# Altium PCB CW308T-FE310-G002.PcbDoc
Units mil, origin at the board's own origin, x right, y up, seen from the top; angles counter-clockwise.
Board outline 2055 x 2540 mil, 2 copper layers (Top Layer, Bottom Layer); 21 components, 35 nets, 165 pads, 219 vias.
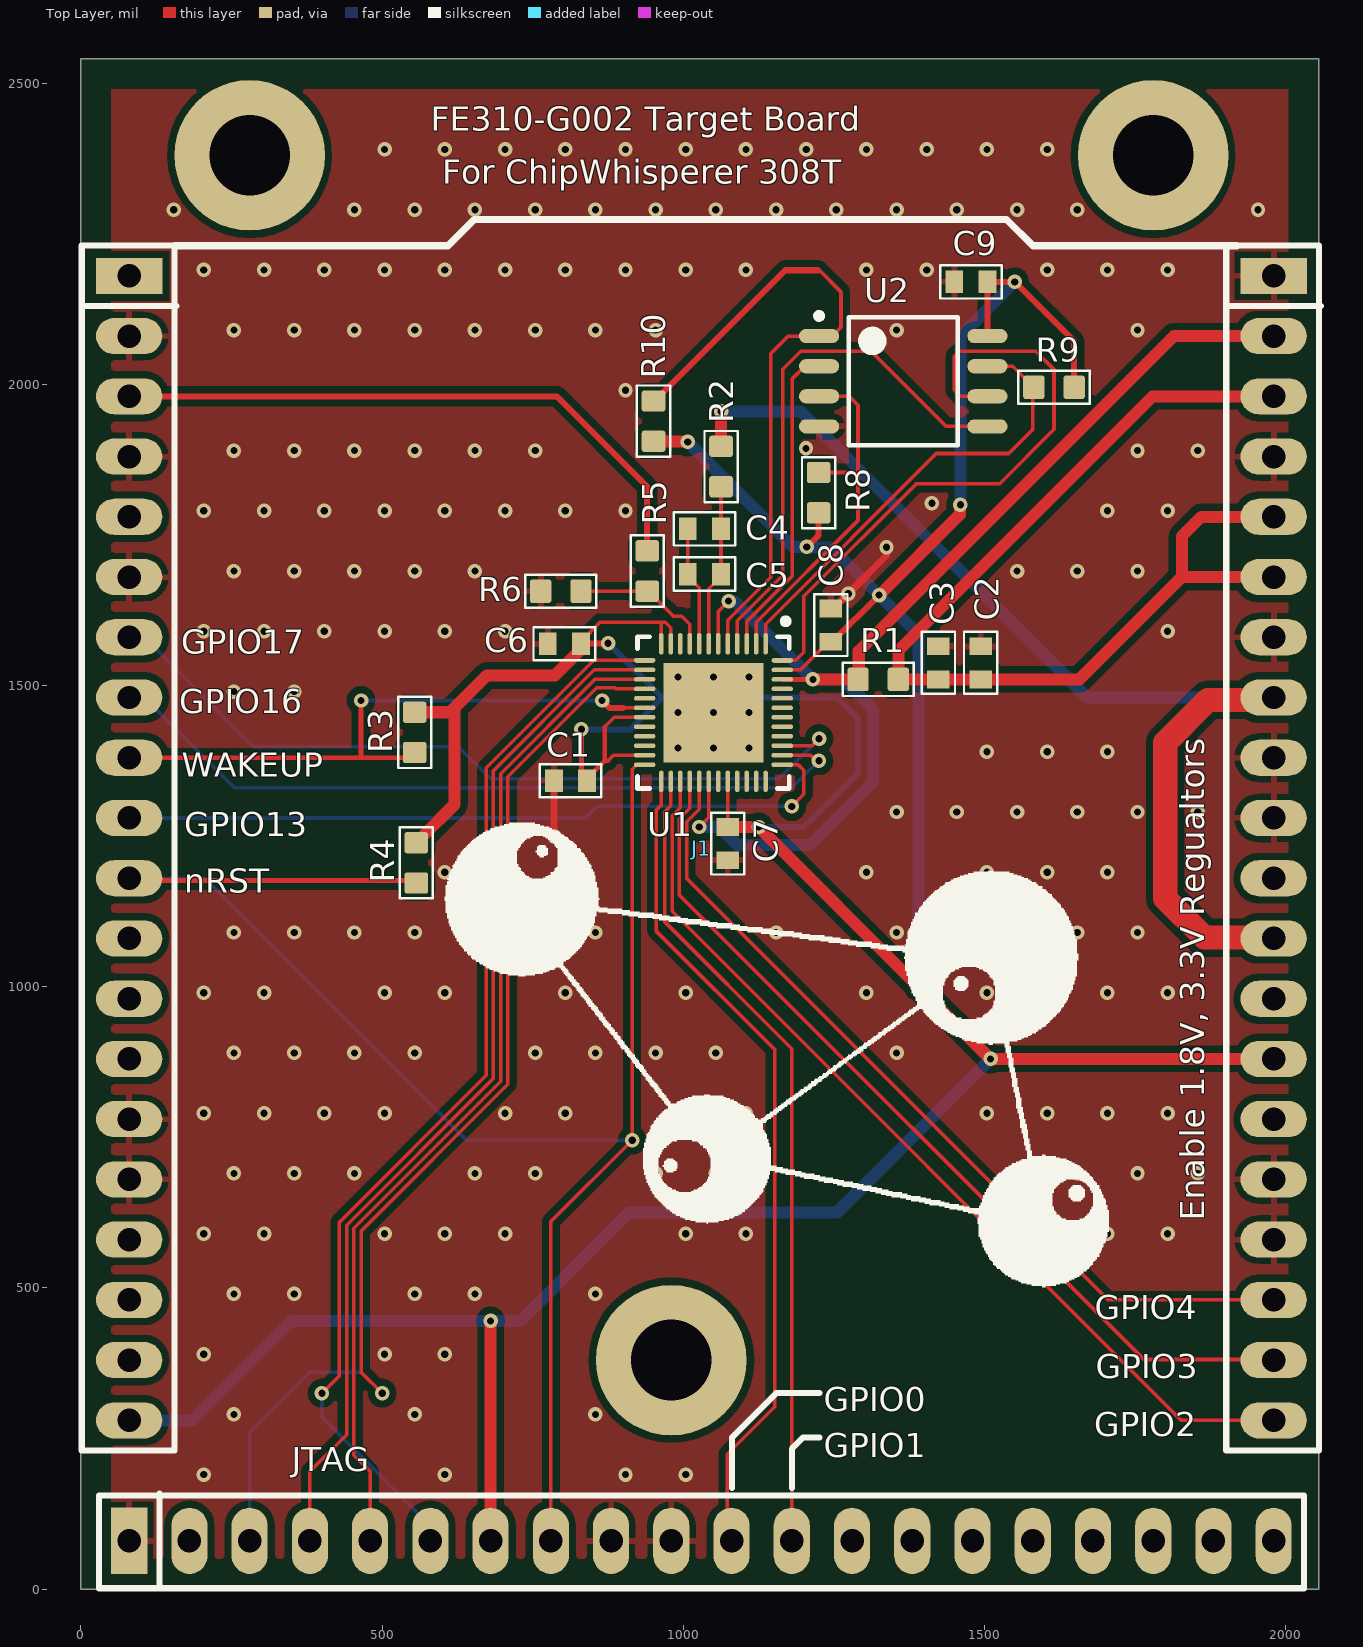
[diagram p0: Top Layer view]
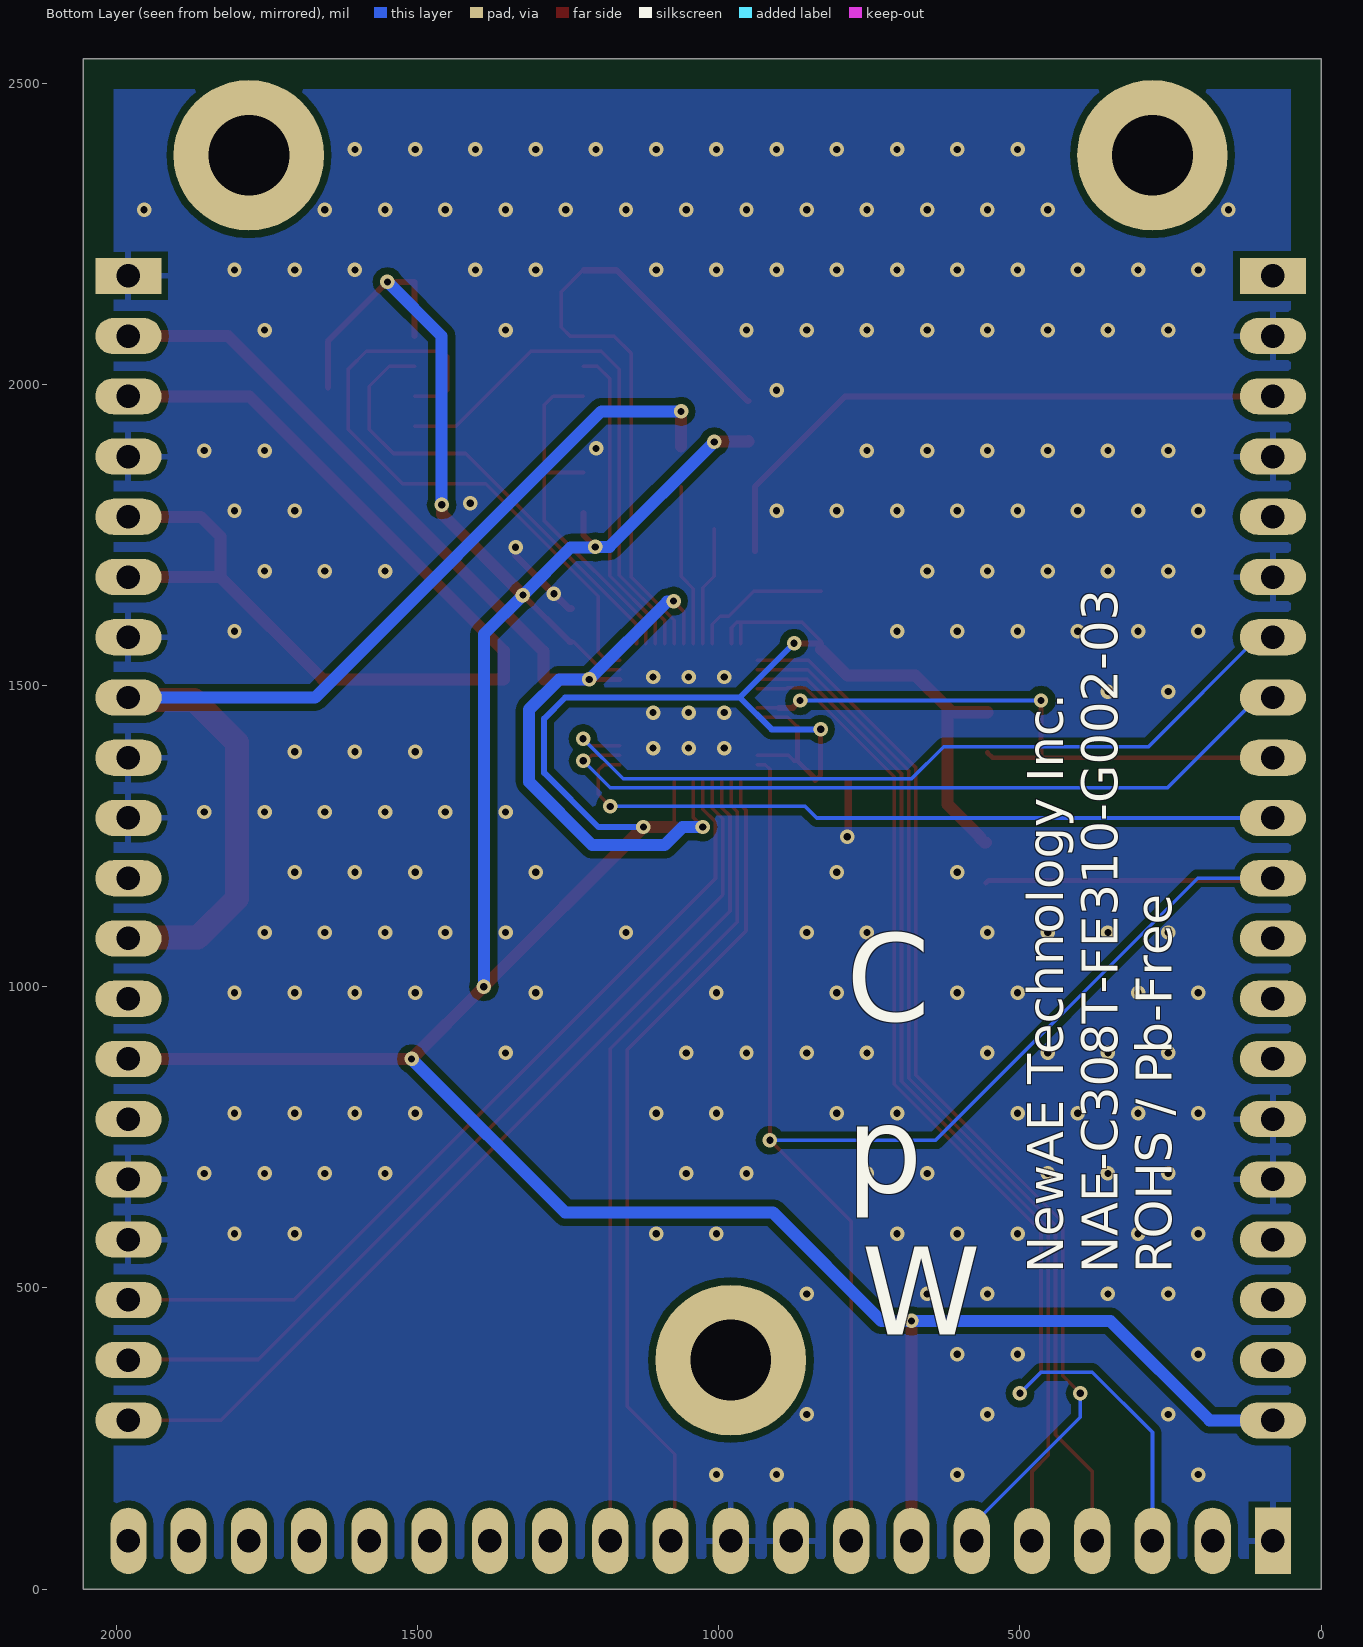
[diagram p1: Bottom Layer view, seen from below]

## Layer stack, top to bottom
Top Solder: solder mask 0.4, Solder Resist, Dk 3.5
Top Layer: signal copper 1.4
Dielectric 1: dielectric 12.6, FR-4, Dk 4.8
Bottom Layer: signal copper 1.4
Bottom Solder: solder mask 0.4, Solder Resist, Dk 3.5

## Board outline
0,0 2055,0 2055,2540 0,2540

## Design rules (kind name [scope] priority, off if disabled: settings)
BoardOutlineClearance Silk_to_Outline [(OnLayer('Top Overlay'))] p1: gap=0 ignorepadtopadclearanceinfootprint=FALSE
BoardOutlineClearance [All] p2: gap=50 ignorepadtopadclearanceinfootprint=FALSE
Clearance Clearance_1 [IsRegion] p1: gap=12 ignorepadtopadclearanceinfootprint=FALSE
Clearance [All] p2: gap=6 ignorepadtopadclearanceinfootprint=FALSE except(0: Arc-Hole Track-Hole SMDPad-Hole THPad-Hole Via-Hole Fill-Hole Poly-Hole Region-Hole Text-Hole)
HoleSize [All] p1: absolutevalues=TRUE maxlimit=200 minlimit=1 maxpercent=80.000 minpercent=20.000
MinimumSolderMaskSliver [All] p1: minsoldermaskwidth=5
PlaneConnect PlaneConnect_viaDirect [IsVia] p1: planeconnectstyle=Direct reliefexpansion=20 reliefentries=4 reliefconductorwidth=10 reliefairgap=10
PlaneConnect [All] p2: planeconnectstyle=Relief reliefexpansion=20 reliefentries=4 reliefconductorwidth=10 reliefairgap=10
PolygonConnect PolygonConnect_viaDirect [All vs isVia] p1: connectstyle=Direct reliefconductorwidth=10 reliefentries=4 polygonreliefangle="90 Angle" airgapwidth=10
PolygonConnect [All] p2: connectstyle=Relief reliefconductorwidth=10 reliefentries=4 polygonreliefangle="90 Angle" airgapwidth=10
RoutingVias [All] p1: holewidth=28 width=50 viastyle="Through Hole" minholewidth=28 minwidth=50 maxholewidth=28 maxwidth=50 useviatemplates=TRUE viatemplateguid#1={EA7B4DBE-D032-4160-A36C-6386A0CA6043} viatemplatename#1=v61h30m0mx0
SilkToSilkClearance [All] p1: silktosilkclearance=5
SilkToSolderMaskClearance [IsPad] p1: minsilkscreentomaskgap=5 clearancetoexposedcopper=TRUE
SolderMaskExpansion [All] p1: expansion=4 istentingtop=FALSE
Width [All] p1: maxlimit=50 minlimit=6 preferedwidth=8
25 further rules are at their usual default settings.

## Classes and differential pairs
component class CW308T-FE310-G002-CONN: J1

## Components (designator, comment, footprint, x,y, rotation, side; value= is the part's Value field where it differs from the comment)
C1 "100n" CAPC0603_M 812.68,1341.81 r180 top
C2 "2u2" CAPC0603_M 1493.46,1537.68 r90 top
C3 "100n" CAPC0603_M 1423.46,1537.68 r90 top
C4 "100n" CAPC0603_M 1035,1760 r180 top
C5 "100n" CAPC0603_M 1035,1685 r180 top
C6 "100n" CAPC0603_M 802.44,1569.17 r180 top
C7 "100n" CAPC0603_M 1073.62,1237.44 r270 top
C8 "100n" CAPC0603_M 1245,1600 r90 top
C9 "100n" CAPC0603_M 1477.44,2170 r180 top
J1 "CW308_TARGETCON" CW308_TBOARD_CONN 80,2180 r0 top locked
R1 "10R" RESC1608X55N 1323.46,1510.12 r180 top
R2 "100R" RESC1608X55N 1062.56,1863.46 r270 top
R3 "100k" RESC1608X55N 553.94,1422.05 r270 top
R4 "100k" RESC1608X55N 556.69,1205.51 r270 top
R5 "100R" RESC1608X55N 940,1690 r270 top
R6 "330R" RESC1608X55N 796.54,1656.54 r180 top
R8 "100k" RESC1608X55N 1224.54,1820 r90 top
R9 "100k" RESC1608X55N 1615.31,1995 r180 top
R10 "100k" RESC1608X55N 950.47,1938.85 r90 top
U1 "FE310-G002" QFN40P600X600X95_HS-49N 1050,1455 r270 top
U2 "32Mb - W25Q32JV" SOIC127P790X216-8N 1365,2005 r0 top value=32Mb

## Footprints (in the part's own frame and the unit in brackets; to place one, negate y for a bottom-side part, rotate by r counter-clockwise, add the part's x,y. Pads: shape width x height; smd on the part's side, far side on the other; paste and mask are expansions set on the pad)
CAPC0603_M [mm]
  rect 0.75x0.95 smd: 1(-0.7,0) 2(0.7,0)
  silkscreen extent -1.3,-0.7 1.3,0.7, body extent -0.85,-0.45 0.85,0.45, height 0.9
CW308_TBOARD_CONN [mil]
  rect 110x60 hole 39: A1(0,0) C1(1900,0)
  oval 110x60 hole 39: A2(0,-100) A3(0,-200) A4(0,-300) A5(0,-400) A6(0,-500) A7(0,-600) A8(0,-700) A9(0,-800) A10(0,-900) A11(0,-1000) A12(0,-1100) A13(0,-1200) A14(0,-1300) A15(0,-1400) A16(0,-1500) A17(0,-1600) A18(0,-1700) A19(0,-1800) A20(0,-1900) C2(1900,-100) C3(1900,-200) C4(1900,-300) C5(1900,-400) C6(1900,-500) C7(1900,-600) C8(1900,-700) C9(1900,-800) C10(1900,-900) C11(1900,-1000) C12(1900,-1100) C13(1900,-1200) C14(1900,-1300) C15(1900,-1400) C16(1900,-1500) C17(1900,-1600) C18(1900,-1700) C19(1900,-1800) C20(1900,-1900)
  rect 60x110 hole 39: B1(0,-2100)
  oval 60x110 hole 39: B2(100,-2100) B3(200,-2100) B4(300,-2100) B5(400,-2100) B6(500,-2100) B7(600,-2100) B8(700,-2100) B9(800,-2100) B10(900,-2100) B11(1000,-2100) B12(1100,-2100) B13(1200,-2100) B14(1300,-2100) B15(1400,-2100) B16(1500,-2100) B17(1600,-2100) B18(1700,-2100) B19(1800,-2100) B20(1900,-2100)
  round 250 hole 134: MH1(200,200) MH2(900,-1800) MH2(1700,200)
  silkscreen extent -79,-2179 1979,50, body extent -50,-2149 1950,50, height 48
QFN40P600X600X95_HS-49N [mm] "QFN, 48-Leads, Body 6.00x6.00mm, Pitch 0.40mm, Thermal Pad 4.20x4.20mm, IPC Medium Density"
  oval 0.9x0.2 smd: 1(-2.9,2.2) 2(-2.9,1.8) 3(-2.9,1.4) 4(-2.9,1) 5(-2.9,0.6) 6(-2.9,0.2) 7(-2.9,-0.2) 8(-2.9,-0.6) 9(-2.9,-1) 10(-2.9,-1.4) 11(-2.9,-1.8) 12(-2.9,-2.2) 25(2.9,-2.2) 26(2.9,-1.8) 27(2.9,-1.4) 28(2.9,-1) 29(2.9,-0.6) 30(2.9,-0.2) 31(2.9,0.2) 32(2.9,0.6) 33(2.9,1) 34(2.9,1.4) 35(2.9,1.8) 36(2.9,2.2)
  oval 0.2x0.9 smd: 13(-2.2,-2.9) 14(-1.8,-2.9) 15(-1.4,-2.9) 16(-1,-2.9) 17(-0.6,-2.9) 18(-0.2,-2.9) 19(0.2,-2.9) 20(0.6,-2.9) 21(1,-2.9) 22(1.4,-2.9) 23(1.8,-2.9) 24(2.2,-2.9) 37(2.2,2.9) 38(1.8,2.9) 39(1.4,2.9) 40(1,2.9) 41(0.6,2.9) 42(0.2,2.9) 43(-0.2,2.9) 44(-0.6,2.9) 45(-1,2.9) 46(-1.4,2.9) 47(-1.8,2.9) 48(-2.2,2.9)
  rect 4.2x4.2 smd: PAD(0,0)
  silkscreen extent -3.97,-3.2 3.2,3.2, body extent -3.05,-3.05 3.05,3.05, height 0.95
RESC1608X55N [mm] "Chip Resistor, Body 1.6x0.8mm, EIA 0603, IPC Medium Density"
  round 0.254 on Mech15: 0(0,0)
  rrect25% 0.9x1 smd: 1(-0.85,0) 2(0.85,0)
  Top Layer pour cut-out: -0.6,0.5 0.6,0.5 0.6,-0.5 -0.6,-0.5
  silkscreen extent -1.5,-0.7 1.5,0.7, body extent -0.87,-0.47 0.88,0.48, height 0.54
SOIC127P790X216-8N [mm] "SOIC, 8-Leads, Body 5.28x5.28mm, Pitch 1.27mm, IPC Medium Density"
  oval 1.7x0.6 smd: 1(-3.55,1.905) 2(-3.55,0.635) 3(-3.55,-0.635) 4(-3.55,-1.905) 5(3.55,-1.905) 6(3.55,-0.635) 7(3.55,0.635) 8(3.55,1.905)
  silkscreen extent -3.67,-2.7 2.3,2.88, body extent -3.95,-2.7 3.95,2.7, height 2.16

## Part data
C1 C3 C4 C5 C6 C7 C8 C9: library part CCHIP-100n-0603, "100n, 0603", Case-EIA=0603, Case-Metric=1608, Manufacture 1=Kemet, Manufacture Part Number 1=C0603C104K5RACTU, Rated Voltage=50VDC, Supplier Part Number 1=399-5089-2-ND, Component Group=Capacitor, Component Type=Standard, Mounting Technology=SMT, Part Number=CCHIP-100n-0603, Pin Count=2, Supplier 1=Digi-Key
C2: library part CCHIP-2u2-0603, "2u2, 0603", Case-EIA=0603, Case-Metric=1608, Manufacture 1=Samsung, Manufacture Part Number 1=CL10B225KP8NNNC, Rated Voltage=10VDC, Supplier Part Number 1=1276-1134-2-ND, Component Group=Capacitor, Component Type=Standard, Mounting Technology=SMT, Part Number=CCHIP-2u2-0603, Pin Count=2, Supplier 1=Digi-Key
J1: library part CW308_TBOARD, "CW308 \"Standard\" Target Board Connector", Component Group=Mechanical, Component Type=Standard, Mounting Technology=Through-hole, Part Number=CW308_TBOARD, Pin Count=60, Pitch=2.54mm
R1: library part RCHIP-10R-0603, "10R res, 0603, 1%, 1/10W", Case-EIA=0603, Case-Metric=1608, Manufacture 1=Yageo, Manufacture Part Number 1=RC0603FR-0710RL, Rated Power=0.1W, Rated Voltage=75VDC, Supplier Part Number 1=311-10.0HRCT-ND, Temperature Range="-55C to 155C", Tolerance=1%, Component Group=Resistor, Component Type=Standard, Mounting Technology=SMT, Part Number=RCHIP-10R-0603, Pin Count=2, Supplier 1=Digi-Key
R2 R5: library part RCHIP-100R-0603, "100R res, 0603, 1%, 1/10W", Case-EIA=0603, Case-Metric=1608, Manufacture 1=Yageo, Manufacture Part Number 1=RC0603FR-07100RL, Rated Power=0.1W, Rated Voltage=75VDC, Supplier Part Number 1=311-100HRCT-ND, Temperature Range="-55C to 155C", Tolerance=1%, Component Group=Resistor, Component Type=Standard, Mounting Technology=SMT, Part Number=RCHIP-100R-0603, Pin Count=2, Supplier 1=Digi-Key
R3 R4 R8 R9 R10: library part RCHIP-100K-0603, "100k res, 0603, 1%, 1/10W", Case-EIA=0603, Case-Metric=1608, Manufacture 1=Yageo, Manufacture Part Number 1=RC0603FR-07100KL, Rated Power=0.1W, Rated Voltage=75VDC, Supplier Part Number 1=311-100KHRCT-ND, Temperature Range="-55C to 155C", Tolerance=1%, Component Group=Resistor, Component Type=Standard, Mounting Technology=SMT, Part Number=RCHIP-100K-0603, Pin Count=2, Supplier 1=Digi-Key
R6: library part RCHIP-330R-0603, "330R res, 0603, 1%, 1/10W", Case-EIA=0603, Case-Metric=1608, Manufacture 1=Yageo, Manufacture Part Number 1=RC0603FR-07330RL, Rated Power=0.1W, Rated Voltage=75VDC, Supplier Part Number 1=311-330HRCT-ND, Temperature Range="-55C to 155C", Tolerance=1%, Component Group=Resistor, Component Type=Standard, Mounting Technology=SMT, Part Number=RCHIP-330R-0603, Pin Count=2, Supplier 1=Digi-Key
U1: "RISC-V FREEDOM SoC", Manufacture 1=SiFive, Component Group="Digital IC", Component Type=Standard, Manufacture Part Number 1=FE310-G002, Mounting Technology=SMT, Part Number=FE310-G002, Pin Count=48, PP Material Stack=0, PP Rotation=0
U2: library part QSPI-FLASH-32M-32Mb, "IC FLASH 32M SPI 133MHZ 8SOIC", Manufacture 1="Winbond Electronics", Manufacture Part Number 1="W25Q32JVSSIQ TR", Supplier Part Number 1=W25Q32JVSSIQCT-ND, Component Group="Digital IC", Component Type=Standard, Mounting Technology=SMT, Part Number=QSPI-FLASH-32M-32Mb, Pin Count=8, PP Material Stack=0, PP Rotation=0, RoHS=Yes, Supplier 1=Digi-Key

## Via types
v1: diameter 24, hole 12, Top Layer to Bottom Layer, tented both sides, 219 vias

## Nets (pads, with @x,y where several pads share a name; then routed paths per layer and width w, separated by ;. In a path a pad name is that pad's centre, name@x,y a point inside that pad or via, vN(x,y) a via of type N, cw(c..) or ccw(c..) an arc to the next point about the centre after c; other vN are vias at no path point)
+1V8: J1.C8 J1.C12 R2.1 | length 1849.4
  Top Layer w20: R2.1 v1(1062.56,1955)
  Top Layer w40: J1.C12 1978.62,1081.38 1865,1081.38 1800,1146.38 1800,1405 1871.17,1476.17 1976.17,1476.17 J1.C8
  Bottom Layer w20: v1(1062.56,1955) 1195,1955 1670,1480 J1.C8
+3V3: C1.1 C6.1 C7.1 C8.1 C9.1 J1.A20 J1.B7 J1.C14 R3.1 R4.1 R8.1 R9.1 R10.1 U1.11 U1.12 U1.19 U1.23 U1.32 U1.47 U2.8 | length 7689.8
  Top Layer w6: C6.1 830,1573.11 861.7,1604.81 963.39,1604.81 ; 869.49,1431.38 885.24,1447.13 U1.19 ; 875,1375 884.13,1384.13 U1.23 ; U1.12 963.39,1604.81 ; U1.11 978.92,1569.39 978.92,1595.89 970,1604.81 963.39,1604.81 ; C7.1 U1.32 ; U1.47 1194.49,1525.87 1241.06,1572.44 C8.1
  Top Layer w8: v1(830.83,1427.17) 830.83,1351.22 C1.1 840.24,1345.75 869.49,1375 ; 869.49,1431.38 869.49,1375 ; 875,1375 869.49,1375
  Top Layer w10: C6.1@830,1560 C6.1 830.83,1570 v1(875,1570) ; v1(1205,1730) 1224.54,1749.54 R8.1 ; C8.1 1247.44,1572.44 v1(1325,1650) ; U2.8 1505,2080.24 C9.1 v1(1550,2170) 1648.78,2071.22 R9.1
  Top Layer w20: R3.1 612.72,1455.51 620.08,1462.87 ; R4.1 558.66,1238.98 566.38,1246.69 566.38,1248.66 620.08,1302.36 620.08,1462.87 ; J1.B7 v1(680,445) ; C6.1@830,1560 786.54,1516.54 673.74,1516.54 620.08,1462.87 ; R10.1 951.06,1904.8 1006.85,1904.8 v1(1007.44,1904.21) ; C7.1 v1(1125,1265) v1(1390,1000) v1(1510,880) J1.C14 ; v1(1325,1650) 1459.23,1784.23 1459.23,1799.23 v1(1460,1800)
  Bottom Layer w10: v1(830.83,1427.17) 912.17,1427.17 965,1480 ; v1(875,1570) 965,1480 ; v1(1125,1265) 1200,1265 1290,1355 1290,1445 1255,1480 965,1480
  Bottom Layer w20: J1.A20 185,280 350,445 v1(680,445) 730,445 910,625 1255,625 v1(1510,880) ; v1(1007.44,1904.21) 1181.65,1730 v1(1205,1730) 1205.77,1729.23 1245.77,1729.23 v1(1325,1650) 1390,1585 v1(1390,1000) ; v1(1460,1800) 1460,2080 v1(1550,2170)
GND: C1.2 C2.2 C3.2 C6.2 C7.2 C8.2 C9.2 J1.A2 J1.A4 J1.A6 J1.A15 J1.A16 J1.B1 J1.B9 J1.B10 J1.C1 J1.C4 J1.C7 J1.C9 J1.C10 J1.C16 J1.C17 R6.2 U1.PAD U2.4 | length 236
  Top Layer w12: C1.2 785.12,1250.08 v1(786.54,1248.66) ; C8.2 1248.94,1627.56 v1(1273.7,1652.32) 1337.23,1715.85 v1(1337.23,1729.3)
  other v1: 203.94,189.91 603.94,189.91 903.94,189.91 1003.94,189.91 253.94,289.91 553.94,289.91 853.94,289.91 203.94,389.91 503.94,389.91 603.94,389.91 253.94,489.91 353.94,489.91 553.94,489.91 653.94,489.91 853.94,489.91 203.94,589.91 303.94,589.91 503.94,589.91 603.94,589.91 703.94,589.91 1003.94,589.91 1103.94,589.91 1703.94,589.91 1803.94,589.91 253.94,689.91 353.94,689.91 453.94,689.91 653.94,689.91 753.94,689.91 953.94,689.91 1053.94,689.91 1553.94,689.91 1653.94,689.91 1753.94,689.91 1853.94,689.91 203.94,789.91 303.94,789.91 403.94,789.91 503.94,789.91 703.94,789.91 803.94,789.91 1003.94,789.91 1103.94,789.91 1503.94,789.91 1603.94,789.91 1703.94,789.91 1803.94,789.91 253.94,889.91 353.94,889.91 453.94,889.91 553.94,889.91 753.94,889.91 853.94,889.91 953.94,889.91 1053.94,889.91 1353.94,889.91 203.94,989.91 303.94,989.91 503.94,989.91 603.94,989.91 803.94,989.91 1003.94,989.91 1303.94,989.91 1503.94,989.91 1603.94,989.91 1703.94,989.91 1803.94,989.91 253.94,1089.91 353.94,1089.91 453.94,1089.91 553.94,1089.91 753.94,1089.91 853.94,1089.91 1153.94,1089.91 1353.94,1089.91 1453.94,1089.91 1553.94,1089.91 1653.94,1089.91 1753.94,1089.91 603.94,1189.91 803.94,1189.91 1303.94,1189.91 1503.94,1189.91 1603.94,1189.91 1703.94,1189.91 1353.94,1289.91 1453.94,1289.91 1553.94,1289.91 1653.94,1289.91 1753.94,1289.91 1853.94,1289.91 1503.94,1389.91 1603.94,1389.91 1703.94,1389.91 990.94,1395.94 1050,1395.94 1109.06,1395.94 990.94,1455 1050,1455 1109.06,1455 253.94,1489.91 353.94,1489.91 990.94,1514.06 1050,1514.06 1109.06,1514.06 203.94,1589.91 303.94,1589.91 403.94,1589.91 503.94,1589.91 603.94,1589.91 703.94,1589.91 1803.94,1589.91 253.94,1689.91 353.94,1689.91 453.94,1689.91 553.94,1689.91 653.94,1689.91 1553.94,1689.91 1653.94,1689.91 1753.94,1689.91 203.94,1789.91 303.94,1789.91 403.94,1789.91 503.94,1789.91 603.94,1789.91 703.94,1789.91 803.94,1789.91 903.94,1789.91 1703.94,1789.91 1803.94,1789.91 1412.67,1802.43 253.94,1889.91 353.94,1889.91 453.94,1889.91 553.94,1889.91 653.94,1889.91 753.94,1889.91 1753.94,1889.91 1853.94,1889.91 1203.58,1893.48 903.94,1989.91 253.94,2089.91 353.94,2089.91 453.94,2089.91 553.94,2089.91 653.94,2089.91 753.94,2089.91 853.94,2089.91 953.94,2089.91 1353.94,2089.91 1753.94,2089.91 203.94,2189.91 303.94,2189.91 403.94,2189.91 503.94,2189.91 603.94,2189.91 703.94,2189.91 803.94,2189.91 903.94,2189.91 1003.94,2189.91 1103.94,2189.91 1303.94,2189.91 1403.94,2189.91 1603.94,2189.91 1703.94,2189.91 1803.94,2189.91 153.94,2289.91 453.94,2289.91 553.94,2289.91 653.94,2289.91 753.94,2289.91 853.94,2289.91 953.94,2289.91 1053.94,2289.91 1153.94,2289.91 1253.94,2289.91 1353.94,2289.91 1453.94,2289.91 1553.94,2289.91 1653.94,2289.91 1953.94,2289.91 503.94,2389.91 603.94,2389.91 703.94,2389.91 803.94,2389.91 903.94,2389.91 1003.94,2389.91 1103.94,2389.91 1203.94,2389.91 1303.94,2389.91 1403.94,2389.91 1503.94,2389.91 1603.94,2389.91
H1: J1.B11 U1.25 | length 1381.5
  Top Layer w6: U1.25 963.39,1301.39 954.72,1292.72 954.72,1092.52 1151.57,895.67 1151.57,302.36 1072.83,223.62 1072.83,87.17 J1.B11
H2: J1.B12 U1.26 | length 1352.1
  Top Layer w6: U1.26 979.13,1300.16 969.38,1290.41 969.38,1107.39 1180,896.77 J1.B12
JTAG_TCK: J1.B6 U1.13 | length 1807.8
  Top Layer w6: v1(400,325) 429,354 429,609 672.66,852.66 672.66,1363.27 851,1541.61 U1.13
  Bottom Layer w6: v1(400,325) 400,285 580,105 J1.B6
JTAG_TDI: J1.B3 U1.16 | length 1883.7
  Top Layer w6: v1(500,325) 465,360 465,594.09 708.66,837.75 708.66,1348.36 856.3,1496 885.89,1496 887.52,1494.37 U1.16
  Bottom Layer w6: J1.B3 280,260 380,360 465,360 v1(500,325)
JTAG_TDO: J1.B4 U1.14 | length 1725.1
  Top Layer w6: J1.B4 380,195 441,256 441,604.03 684.66,847.69 684.66,1358.3 852.23,1525.87 U1.14
JTAG_TMS: J1.B5 U1.15 | length 1689.6
  Top Layer w6: J1.B5 480,195 453,222 453,599.06 696.66,842.72 696.66,1353.33 853.45,1510.12 U1.15
LED1: J1.C18 U1.29 | length 1434.3
  Top Layer w6: U1.29 1026.38,1294.7 1005.38,1273.7 1005.38,1179.66 1705.04,480 J1.C18
LED2: J1.C19 U1.28 | length 1502.2
  Top Layer w6: U1.28 1010.63,1295.92 993.38,1278.67 993.38,1152.29 1764.67,381 1979,381 J1.C19
LED3: J1.C20 U1.27 | length 1570.1
  Top Layer w6: U1.27 994.88,1297.14 981.38,1283.64 981.38,1124.92 1826.3,280 J1.C20
NetC4_1: C4.1 C5.1 R2.2 U1.7 | length 269.3
  Top Layer w6: U1.7 1042.13,1660.63 1062.56,1681.06 C5.1 C4.1 R2.2
NetC4_2: C4.2 C5.2 U1.8 | length 198.7
  Top Layer w6: C4.2 C5.2 1007.44,1681.06 1026.38,1662.13 U1.8
NetJ1_A3: J1.A3 R5.1 | length 1028.7
  Top Layer w10: J1.A3 790,1980 940,1830 R5.1
NetJ1_A5: J1.A5
NetJ1_A12: J1.A12
NetJ1_A13: J1.A13
NetJ1_A14: J1.A14
NetJ1_A17: J1.A17
NetJ1_A18: J1.A18
QSPI_CS: R10.2 U1.5 U2.1 | length 1120
  Top Layer w6: U1.5 1073.62,1608.47 1145,1679.85 1145,2050.94 1174.06,2080 1246.89,2080 1261.7,2094.81 1261.7,2153.3 1224.54,2190.46
  Top Layer w10: R10.2 952.44,1972.32 1169.41,2189.28 1223.37,2189.28
QSPI_DQ0: U1.4 U2.5 | length 891.1
  Top Layer w6: U1.4 1089.37,1607.25 1165,1682.88 1165,2025 1195,2055 1311.63,2055 1436.63,1930 U2.5
QSPI_DQ1: U1.3 U2.2 | length 524.4
  Top Layer w6: U1.3 1105.12,1606.03 1181.06,1681.97 1181.06,2009.44 1201.61,2030 U2.2
QSPI_DQ2: R8.2 U1.2 U2.3 | length 603
  Top Layer w6: U1.2 1120.87,1604.81 1290,1773.94 1290,1855 ; R8.2 1288.46,1853.46 1290,1855 ; U2.3 1275,1980 1290,1965 1290,1855
QSPI_DQ3: R9.2 U1.1 U2.7 | length 770.6
  Top Layer w6: U1.1 1136.61,1601.61 1420,1885 1540,1885 1580,1925 1580,1996.85 1546.85,2030 U2.7
QSPI_SCK: U1.48 U2.6 | length 1060.8
  Top Layer w6: U1.48 1186.61,1541.61 1200,1555 1200,1648.03 1386.97,1835 1525,1835 1615.31,1925.31 1615.31,2024.69 1585,2055 1458.46,2055 1450,2046.54 1450,1990 1460,1980 U2.6
RESET: J1.A11 J1.B8 R4.2 U1.24 | length 2882.2
  Top Layer w6: J1.A11 J1.A11@105,1180 ; R4.2@555.35,1172.05 R4.2 ; J1.B8 780,610 v1(915,745) 915,1360.83 922.55,1368.39 U1.24
  Top Layer w8: J1.A11 83.65,1176.35 552.39,1176.35 R4.2
  Bottom Layer w6: J1.A11 205,1180 640,745 v1(915,745)
SHUNT_HIGH: C2.1 C3.1 J1.C3 J1.C5 J1.C6 R1.1 | length 1772.5
  Top Layer w20: J1.C6 1827.44,1680 ; J1.C5 1860,1780 1827.44,1747.44 1827.44,1680 ; J1.C3 1779.25,1980 1356.93,1557.68 R1.1 C3.1 C2.1 1657.56,1510.12 1827.44,1680
SHUNT_LOW: J1.C2 R1.2 U1.6 U1.30 U1.46 | length 2017.9
  Top Layer w6: v1(1026.38,1265) 1042.13,1280.75 U1.30 ; U1.6 1057.87,1622.87 v1(1075,1640)
  Top Layer w8: U1.46 v1@1215,1510.12
  Top Layer w20: v1@1215,1510.12 R1.2 1291.18,1511.3 1291.18,1556.86 1814.32,2080 J1.C2
  Bottom Layer w20: v1(1026.38,1265) 1060,1265 1090,1235 1210,1235 1315,1340 1315,1460 1265,1510 v1(1215,1510) 1085.77,1639.23 1075.77,1639.23 v1(1075,1640)
SYSTEM_CLOCK: R5.2 R6.1 U1.9 | length 235.9
  Top Layer w6: R6.1 R5.2 941.97,1656.54 983.5,1615 997.44,1615 1010.63,1601.81 U1.9
TRIGGER: J1.A10 U1.37 | length 1215.8
  Top Layer w6: U1.37 1164.45,1368.11 1191,1368.11 1200,1359.11 1200,1319.21 v1(1180,1299.21)
  Bottom Layer w6: J1.A10 837.09,1280 856.3,1299.21 v1(1180,1299.21)
UART_RX: J1.A8 U1.38 | length 1290.4
  Top Layer w6: U1.38 1211,1384.13 1220.13,1375 v1(1225,1375)
  Bottom Layer w6: J1.A8 105,1480 255,1330 1180,1330 v1(1225,1375)
UART_TX: J1.A7 U1.39 | length 1336.2
  Top Layer w6: U1.39 1213.43,1399.88 v1(1225.24,1411.69)
  Bottom Layer w6: J1.A7 105,1580 286.51,1398.49 626.51,1398.49 680,1345 1158.54,1345 v1(1225.24,1411.69)
wakeup: J1.A9 R3.2 U1.18 | length 1048.3
  Top Layer w6: 900,1462.87 U1.18
  Top Layer w8: J1.A9 465,1380 ; v1(465,1475) 465,1380 ; R3.2 545.35,1380 465,1380
  Top Layer w10: v1(865,1475) 877.13,1462.87 900,1462.87
  Bottom Layer w6: v1(465,1475) v1(865,1475)
pads on no net: J1.A1 J1.A19 J1.B2 J1.B13 J1.B14 J1.B15 J1.B16 J1.B17 J1.B18 J1.B19 J1.B20 J1.C11 J1.C13 J1.C15 J1.MH1 J1.MH2 R1.0 R2.0 R3.0 R4.0 R5.0 R6.0 R8.0 R9.0 R10.0 U1.10 U1.17 U1.20 U1.21 U1.22 U1.31 U1.33 U1.34 U1.35 U1.36 U1.40 U1.41 U1.42 U1.43 U1.44 U1.45

## Polygon pours and split planes (outlines as drawn)
GND on Bottom Layer "GND_L02_P002" (solid, remove dead copper, pour order 2): 0,0 0,2559.06 2047.24,2559.06 2047.24,0
GND on Top Layer "GND_L01_P000" (solid, remove dead copper, pour order 0): 0,2559.06 2047.24,2559.06 2047.24,0 0,0

## Silkscreen, mask and mechanical layers (free items; w line width, h text height)
Top Overlay:
  drawing of 18 lines, arcs and shapes, not listed
  text "FE310-G002 Target Board" at 580.71,2421.26 h40
  text "For ChipWhisperer 308T" at 600,2332.68 h40
  text "GPIO17" at 166.14,1552.82 h40
  text "GPIO16" at 163.39,1453.72 h40
  text "WAKEUP" at 167.23,1348.57 h40
  text "GPIO13" at 171.26,1250 h40
  text "nRST" at 171.26,1155.53 h40
  text "Enable 1.8V, 3.3V Regualtors" at 1864.69,611.45 h40 r90
  text "GPIO4" at 1683.37,447.72 h40
  text "GPIO3" at 1684.55,350 h40
  text "GPIO0" at 1233.01,295.46 h40
  text "GPIO2" at 1682.43,253.45 h40
  text "GPIO1" at 1233.01,219.08 h40
  text "JTAG" at 350.04,195.71 h40
Bottom Overlay:
  text "C" at 787.91,894.34 h250
  text "p" at 787.91,609.34 h250
  text "NewAE Technology Inc. / NAE-C308T-FE310-G002-03 / ROHS / Pb-Free" at 247.91,524.34 h60 r270
  text "W" at 762.91,374.34 h250
Mechanical 1:
  the board outline again, w10